# EAGLE board 2016-10-10_13-48-17 (EAGLE 6.4)
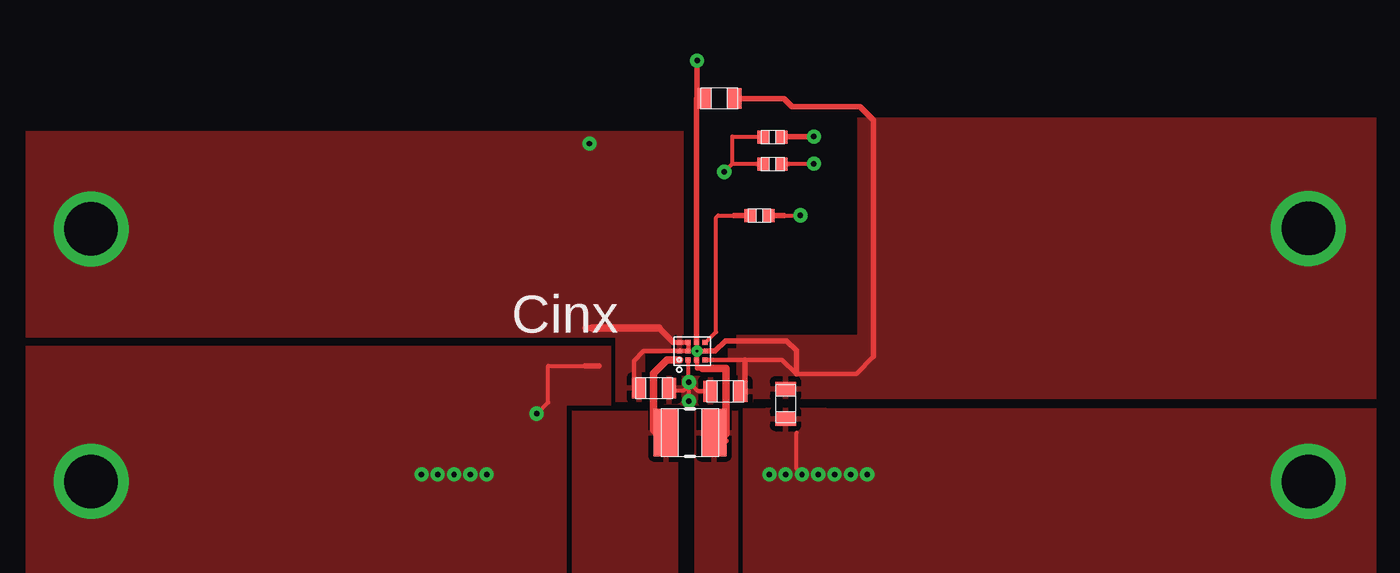
[diagram p0: board, top side]
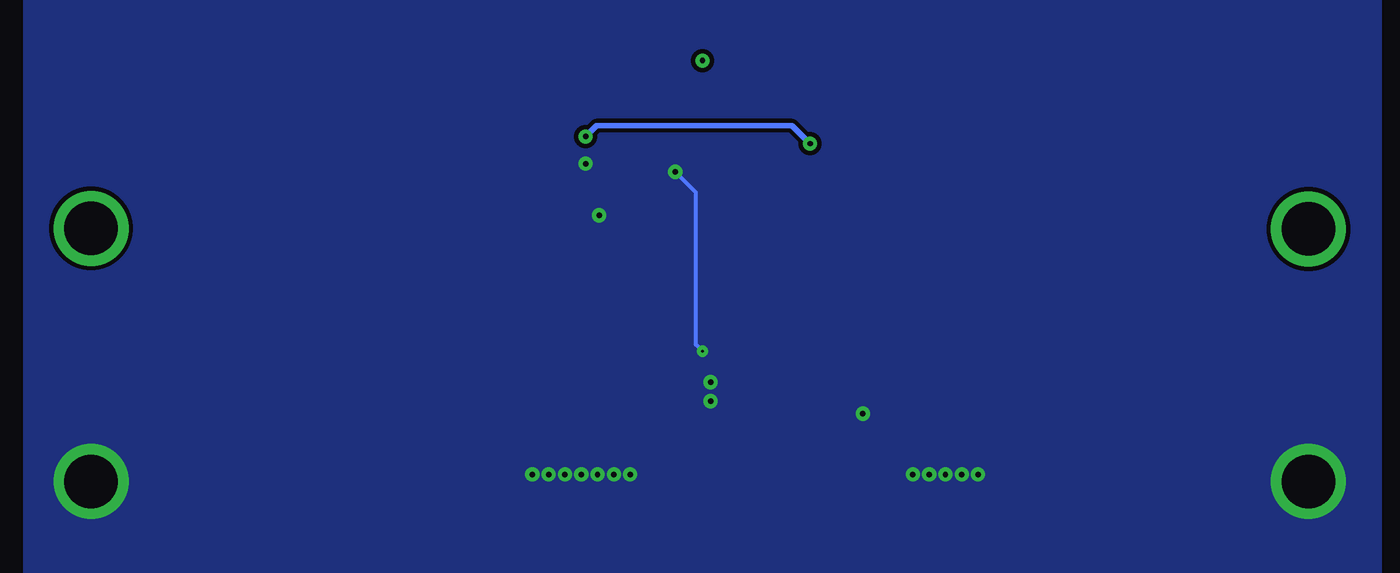
[diagram p1: board, bottom side, seen from below]

No outline drawn. Coordinates in mm, seen from the top.
Copper layers ((1*2)+(15*16)): TOP / INTERNAL1 / layer 15 / BOTTOM

## Footprints (pad centres in the part's own frame; a part is rotated, then mirrored left to right if it is on the bottom)
0603 = smd 0.66 x 0.965: 1 -0.699,0; 2 0.699,0
0402 = smd 0.559 x 0.61: 1 -0.419,0; 2 0.419,0
TP-1502 = drill 0.813 round: 1 0,0
1008 = smd 1.168 x 2.21: 1 -1.118,0; 2 1.118,0
YFF0012AFAF = smd 0.23 x 0.23: 1 -0.4,0.6; 2 0,0.6; 3 0.4,0.6; 4 -0.4,0.2; 5 0,0.2; 6 0.4,0.2; 7 -0.4,-0.2; 8 0,-0.2; 9 0.4,-0.2; 10 -0.4,-0.6; 11 0,-0.6; 12 0.4,-0.6

## Placement (x,y rotation side)
Cin  [0603]  55.78,41.96 0 top
Cout  [0603]  61.93,41.22 270 top
Coutx  [0603]  59.11,41.81 180 top
Css  [0402]  60.71,50.04 0 top
GND1  [TP-1502]  29.44,37.57 0 top
GND2  [TP-1502]  86.36,37.57 0 top
L1  [1008]  57.45,39.88 180 top
Rpfm  [0402]  61.32,52.43 0 top
Rpg  [0603]  58.83,55.5 180 top
Rpwm  [0402]  61.32,53.7 180 top
U1  [YFF0012AFAF]  57.56,43.69 90 top
VIN  [TP-1502]  29.44,49.38 0 top
VOUT  [TP-1502]  86.36,49.43 0 top

## Library data of the parts
Cin = ultra-librarian; RefDes: Cin; Type: LMK107BBJ106MAHT
Cout = ultra-librarian; RefDes: Cout; Type: CL10A106MQ8NNNC
Coutx = ultra-librarian; RefDes: Coutx; Type: CL10A106MQ8NNNC
Css = ultra-librarian; RefDes: Css; Type: GRM155R61A102KA01D
GND1 = ultra-librarian; RefDes: GND1; Type: TP-1502
GND2 = ultra-librarian; RefDes: GND2; Type: TP-1502
L1 = ultra-librarian; RefDes: L1; Type: LQM2HPN1R5MG0L
Rpfm = ultra-librarian; RefDes: Rpfm; Type: CRCW0402100KFKED
Rpg = ultra-librarian; RefDes: Rpg; Type: CRCW0603100KFKEA
Rpwm = ultra-librarian; RefDes: Rpwm; Type: CRCW0402100KFKED
U1 = ultra-librarian; RefDes: U1; Type: TPS63051YFFR
VIN = ultra-librarian; RefDes: VIN; Type: TP-1502
VOUT = ultra-librarian; RefDes: VOUT; Type: TP-1502

## Nets
0: Cin.2 Cout.2 Coutx.2 Css.2 GND1.1 GND2.1 Rpfm.1 Rpfm.2 Rpwm.2 U1.4 U1.8
2: Cin.1 Rpwm.1 U1.2 U1.3 U1.5 U1.6 VIN.1
3: Css.1 U1.12
4: Cout.1 Coutx.1 Rpg.1 U1.10 U1.11 VOUT.1
5: L1.1 U1.1
6: L1.2 U1.7
8: Rpg.2 U1.9

## Tracks (layer width: path | path; a pad name or v marks a point on that pad's centre or on a via)
0  (via drill 0.13 pad 0.23, 0.25 pad 0.56, 2.49 pad 3.48)
  TOP 0.198: 53.01,43 52.88,43 50.83,43 50.83,41.3 | v62.69,37.92 62.43,38.18 62.43,39.88 | 57.38,42.24 57.38,43.28 | 57.4,42.09 v57.4,42.24 57.81,41.83 58.24,41.83 | v57.4,41.35 57.4,42.09 | 56.62,41.86 57.17,41.86 57.4,42.09 | 61.85,52.45 v63.25,52.45 | 59.44,52.45 59.44,53.72 60.83,53.72 | v59.05,52.07 59.44,52.45 | 59.44,52.45 60.73,52.45 | 50.83,41.27 50.83,41.3 | v50.29,40.77 50.83,41.3 | 60.83,53.72 | 61.44,50.04 v62.61,50.04
  TOP 0.254: 52.55,43 53.21,43 | 61.01,50.02 61.85,50.02 | 60.71,53.71 60.94,53.71
  BOTTOM 0.198: v59.05,52.07 | v59.05,52.07 58.09,51.1 58.09,43.99 v57.78,43.69
  other vias: 61.16,37.92 61.93,37.92 63.45,37.92 64.21,37.92 65.74,37.92 64.97,37.92 44.91,37.92 45.67,37.92 46.43,37.92 47.19,37.92 47.96,37.92 86.36,37.59 29.46,37.59
  pour TOP (rank 5): 61.52,52.2 61.52,52.68 62.1,52.68 62.1,52.2
  pour TOP (rank 5): 60.53,52.2 60.53,52.68 61.11,52.68 61.11,52.2
  pour TOP (rank 5): 61.01,38.71 61.01,41.05 63.8,41.05 63.8,38.71
  pour TOP (rank 6): 57.48,43.28 57.48,43.28 57.48,43.31 57.45,43.33 57.45,43.33 57.43,43.36 57.43,43.36 57.4,43.38 57.38,43.38 57.38,43.38 57.35,43.38 57.33,43.38 57.3,43.36 57.3,43.36 57.28,43.33 57.28,43.33 57.25,43.31 57.25,43.28 57.25,43.28 57.25,43.26 57.25,43.23 57.28,43.21 57.28,43.21 57.3,43.18 57.3,43.18 57.33,43.15 57.35,43.15 57.38,43.15 57.38,43.15 57.4,43.15 57.43,43.18 57.43,43.18 57.45,43.21 57.45,43.21 57.48,43.23 57.48,43.26 57.48,43.28
  pour TOP (rank 6): 57.86,43.69 57.86,43.69 57.86,43.71 57.84,43.74 57.84,43.74 57.81,43.76 57.81,43.76 57.78,43.79 57.76,43.79 57.76,43.79 57.73,43.79 57.71,43.79 57.68,43.76 57.68,43.76 57.66,43.74 57.66,43.74 57.63,43.71 57.63,43.69 57.63,43.69 57.63,43.66 57.63,43.64 57.66,43.61 57.66,43.61 57.68,43.59 57.68,43.59 57.71,43.56 57.73,43.56 57.76,43.56 57.76,43.56 57.78,43.56 57.81,43.59 57.81,43.59 57.84,43.61 57.84,43.61 57.86,43.64 57.86,43.66 57.86,43.69
  pour TOP (rank 6): 56.24,42.52 58.65,42.52 58.6,41.15 56.24,41.15
  pour TOP (rank 6): 53.8,43.94 26.42,43.94 26.42,27.94 89.53,27.94 89.53,41.02 59.94,41.02 59.94,33.15 51.69,33.15 51.69,41.15 53.8,41.15
  pour BOTTOM: 26.04,26.16 89.53,26.16 89.53,61.59 26.04,61.59
2  (via drill 0.25 pad 0.56, 2.49 pad 3.48)
  TOP 0.203: 56.97,43.69 55.3,43.69 54.84,43.23 54.84,41.86 | 56.69,44.09 56.97,44.09 | 56.97,43.69 57.38,43.69 57.38,44.07 57.38,44.09 56.97,44.09 | 56.97,43.69 57,43.71 | 56.92,43.69 56.97,43.69 | 56.97,44.09 56.97,44.07 56.97,44.09
  TOP 0.254: 56.01,44.78 56.69,44.09 | 61.85,53.72 v63.25,53.72 | 52.55,44.78 53.21,44.78 | 61.7,53.71 61.92,53.71
  TOP 0.356: 52.88,44.78 56.01,44.78
  BOTTOM 0.254: 52.76,53.37 v52.76,53.39 53.59,54.23 62.74,54.23 v63.25,53.72
  other vias: 29.46,49.4
  pour TOP: 57.07,43.69 57.07,43.69 57.07,43.71 57.05,43.74 57.05,43.74 57.02,43.76 57.02,43.76 57,43.79 56.97,43.79 56.97,43.79 56.95,43.79 56.92,43.79 56.9,43.76 56.9,43.76 56.87,43.74 56.87,43.74 56.85,43.71 56.85,43.69 56.85,43.69 56.85,43.66 56.85,43.64 56.87,43.61 56.87,43.61 56.9,43.59 56.9,43.59 56.92,43.56 56.95,43.56 56.97,43.56 56.97,43.56 57,43.56 57.02,43.59 57.02,43.59 57.05,43.61 57.05,43.61 57.07,43.64 57.07,43.66 57.07,43.69
  pour TOP (rank 2): 57.48,43.69 57.48,43.69 57.48,43.71 57.45,43.74 57.45,43.74 57.43,43.76 57.43,43.76 57.4,43.79 57.38,43.79 57.38,43.79 57.35,43.79 57.33,43.79 57.3,43.76 57.3,43.76 57.28,43.74 57.28,43.74 57.25,43.71 57.25,43.69 57.25,43.69 57.25,43.66 57.25,43.64 57.28,43.61 57.28,43.61 57.3,43.59 57.3,43.59 57.33,43.56 57.35,43.56 57.38,43.56 57.38,43.56 57.4,43.56 57.43,43.59 57.43,43.59 57.45,43.61 57.45,43.61 57.48,43.64 57.48,43.66 57.48,43.69
  pour TOP (rank 2): 57.48,44.07 57.48,44.07 57.48,44.09 57.45,44.12 57.45,44.12 57.43,44.15 57.43,44.15 57.4,44.17 57.38,44.17 57.38,44.17 57.35,44.17 57.33,44.17 57.3,44.15 57.3,44.15 57.28,44.12 57.28,44.12 57.25,44.09 57.25,44.07 57.25,44.07 57.25,44.04 57.25,44.02 57.28,43.99 57.28,43.99 57.3,43.97 57.3,43.97 57.33,43.94 57.35,43.94 57.38,43.94 57.38,43.94 57.4,43.94 57.43,43.97 57.43,43.97 57.45,43.99 57.45,43.99 57.48,44.02 57.48,44.04 57.48,44.07
  pour TOP (rank 4): 53.98,44.32 53.98,41.33 55.35,41.33 55.35,43.59 57.18,43.59 57.18,44.32
  pour TOP (rank 4): 26.42,53.98 57.15,53.98 57.15,44.32 26.42,44.32
3
  TOP 0.198: 58.17,44.07 58.67,44.58 58.67,49.94 58.78,50.04 59.94,50.04 | 58.17,44.07
  TOP 0.254: 59.51,50.02 60.35,50.02
  pour TOP (rank 3): 58.27,44.07 58.27,44.07 58.27,44.09 58.24,44.12 58.24,44.12 58.22,44.15 58.22,44.15 58.19,44.17 58.17,44.17 58.17,44.17 58.14,44.17 58.12,44.17 58.09,44.15 58.09,44.15 58.06,44.12 58.06,44.12 58.04,44.09 58.04,44.07 58.04,44.07 58.04,44.04 58.04,44.02 58.06,43.99 58.06,43.99 58.09,43.97 58.09,43.97 58.12,43.94 58.14,43.94 58.17,43.94 58.17,43.94 58.19,43.94 58.22,43.97 58.22,43.97 58.24,43.99 58.24,43.99 58.27,44.02 58.27,44.04 58.27,44.07
4  (via drill 2.49 pad 3.48)
  TOP 0.203: 66.04,43.43 65.23,42.62 62.43,42.62 61.75,43.28 60.02,43.28 U1.10
  TOP 0.254: 60.02,41.83 60.02,43.28 | 59.84,55.5 61.85,55.5 62.23,55.12 65.41,55.12 66.04,54.48 66.04,43.43 | U1.11 58.62,43.69 59.11,44.17 61.98,44.17 62.43,43.71 62.43,42.62
  other vias: 86.36,49.43
  pour TOP: 58.27,43.28 58.27,43.28 58.27,43.31 58.24,43.33 58.24,43.33 58.22,43.36 58.22,43.36 58.19,43.38 58.17,43.38 58.17,43.38 58.14,43.38 58.12,43.38 58.09,43.36 58.09,43.36 58.06,43.33 58.06,43.33 58.04,43.31 58.04,43.28 58.04,43.28 58.04,43.26 58.04,43.23 58.06,43.21 58.06,43.21 58.09,43.18 58.09,43.18 58.12,43.15 58.14,43.15 58.17,43.15 58.17,43.15 58.19,43.15 58.22,43.18 58.22,43.18 58.24,43.21 58.24,43.21 58.27,43.23 58.27,43.26 58.27,43.28
  pour TOP (rank 2): 58.27,43.69 58.27,43.69 58.27,43.71 58.24,43.74 58.24,43.74 58.22,43.76 58.22,43.76 58.19,43.79 58.17,43.79 58.17,43.79 58.14,43.79 58.12,43.79 58.09,43.76 58.09,43.76 58.06,43.74 58.06,43.74 58.04,43.71 58.04,43.69 58.04,43.69 58.04,43.66 58.04,43.64 58.06,43.61 58.06,43.61 58.09,43.59 58.09,43.59 58.12,43.56 58.14,43.56 58.17,43.56 58.17,43.56 58.19,43.56 58.22,43.59 58.22,43.59 58.24,43.61 58.24,43.61 58.27,43.64 58.27,43.66 58.27,43.69
  pour TOP (rank 3): 59.64,41.33 59.64,42.34 60.4,42.34 60.4,41.33
  pour TOP (rank 4): 59.64,44.45 65.28,44.45 65.28,41.45 59.64,41.45
  pour TOP (rank 4): 65.28,41.45 65.28,54.61 89.53,54.61 89.53,41.45
  pour TOP (rank 5): 59.23,43.38 59.64,43.38 59.64,43.81 59.23,43.81
5
  TOP 0.203: 57.76,43.28 57.78,43.28 57.78,42.88 58.04,42.88
  TOP 0.254: 58.47,39.5 59.13,39.5
  TOP 0.356: 58.04,42.88 59.13,42.88 59.13,39.83 58.8,39.5
  pour TOP: 57.86,43.28 57.86,43.28 57.86,43.31 57.84,43.33 57.84,43.33 57.81,43.36 57.81,43.36 57.78,43.38 57.76,43.38 57.76,43.38 57.73,43.38 57.71,43.38 57.68,43.36 57.68,43.36 57.66,43.33 57.66,43.33 57.63,43.31 57.63,43.28 57.63,43.28 57.63,43.26 57.63,43.23 57.66,43.21 57.66,43.21 57.68,43.18 57.68,43.18 57.71,43.15 57.73,43.15 57.76,43.15 57.76,43.15 57.78,43.15 57.81,43.18 57.81,43.18 57.84,43.21 57.84,43.21 57.86,43.23 57.86,43.26 57.86,43.28
  pour TOP (rank 3): 59.69,40.89 59.69,33.32 57.66,33.32 57.66,40.89
6
  TOP 0.254: 55.93,39.5 56.59,39.5
  TOP 0.356: 56.26,39.5 55.75,40.01 55.75,42.65 56.39,43.28 56.97,43.28
  pour TOP: 57.07,43.28 57.07,43.28 57.07,43.31 57.05,43.33 57.05,43.33 57.02,43.36 57.02,43.36 57,43.38 56.97,43.38 56.97,43.38 56.95,43.38 56.92,43.38 56.9,43.36 56.9,43.36 56.87,43.33 56.87,43.33 56.85,43.31 56.85,43.28 56.85,43.28 56.85,43.26 56.85,43.23 56.87,43.21 56.87,43.21 56.9,43.18 56.9,43.18 56.92,43.15 56.95,43.15 56.97,43.15 56.97,43.15 57,43.15 57.02,43.18 57.02,43.18 57.05,43.21 57.05,43.21 57.07,43.23 57.07,43.26 57.07,43.28
  pour TOP (rank 3): 51.94,40.89 56.9,40.89 56.9,33.32 51.94,33.32
8  (via drill 0.25 pad 0.56)
  TOP 0.254: 57.76,44.07 57.76,55.5 57.78,55.52 v57.78,57.28
  pour TOP (rank 2): 57.86,44.07 57.86,44.07 57.86,44.09 57.84,44.12 57.84,44.12 57.81,44.15 57.81,44.15 57.78,44.17 57.76,44.17 57.76,44.17 57.73,44.17 57.71,44.17 57.68,44.15 57.68,44.15 57.66,44.12 57.66,44.12 57.63,44.09 57.63,44.07 57.63,44.07 57.63,44.04 57.63,44.02 57.66,43.99 57.66,43.99 57.68,43.97 57.68,43.97 57.71,43.94 57.73,43.94 57.76,43.94 57.76,43.94 57.78,43.94 57.81,43.97 57.81,43.97 57.84,43.99 57.84,43.99 57.86,44.02 57.86,44.04 57.86,44.07

## Text on the board
ASSYNOTES: Cinx